# Altium PCB STM32F722-KUY.PcbDoc
Units mm, origin at the board's own origin, x right, y up, seen from the top; angles counter-clockwise.
Board outline 50.16 x 50.29 mm, 2 copper layers (Top Layer, Bottom Layer); 30 components, 61 nets, 186 pads, 23 vias.
Unrouted connection lines stored in the file: 9.
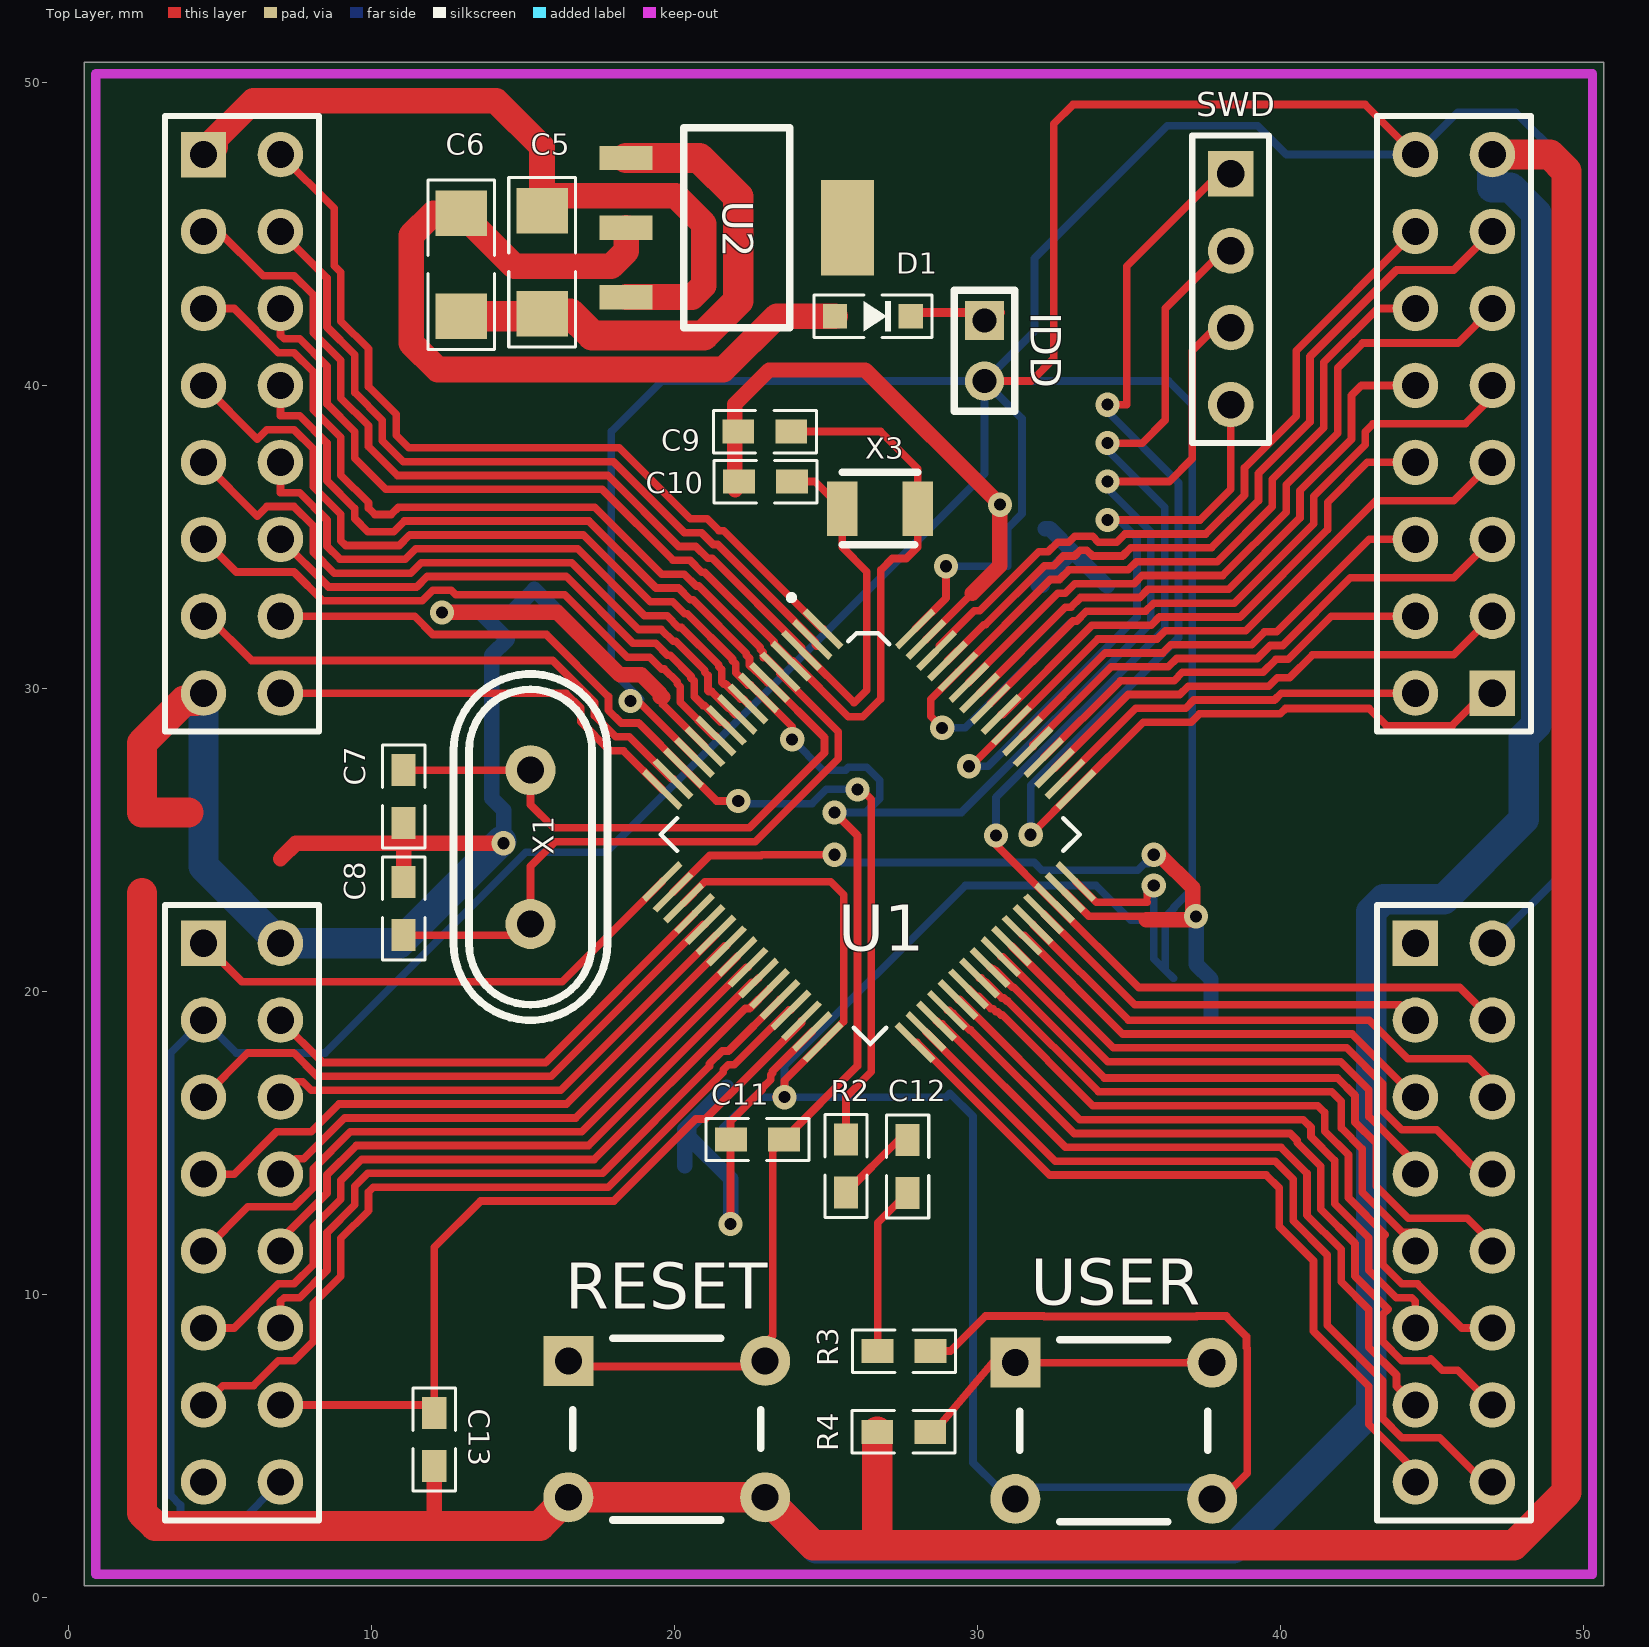
[diagram p0: Top Layer view]
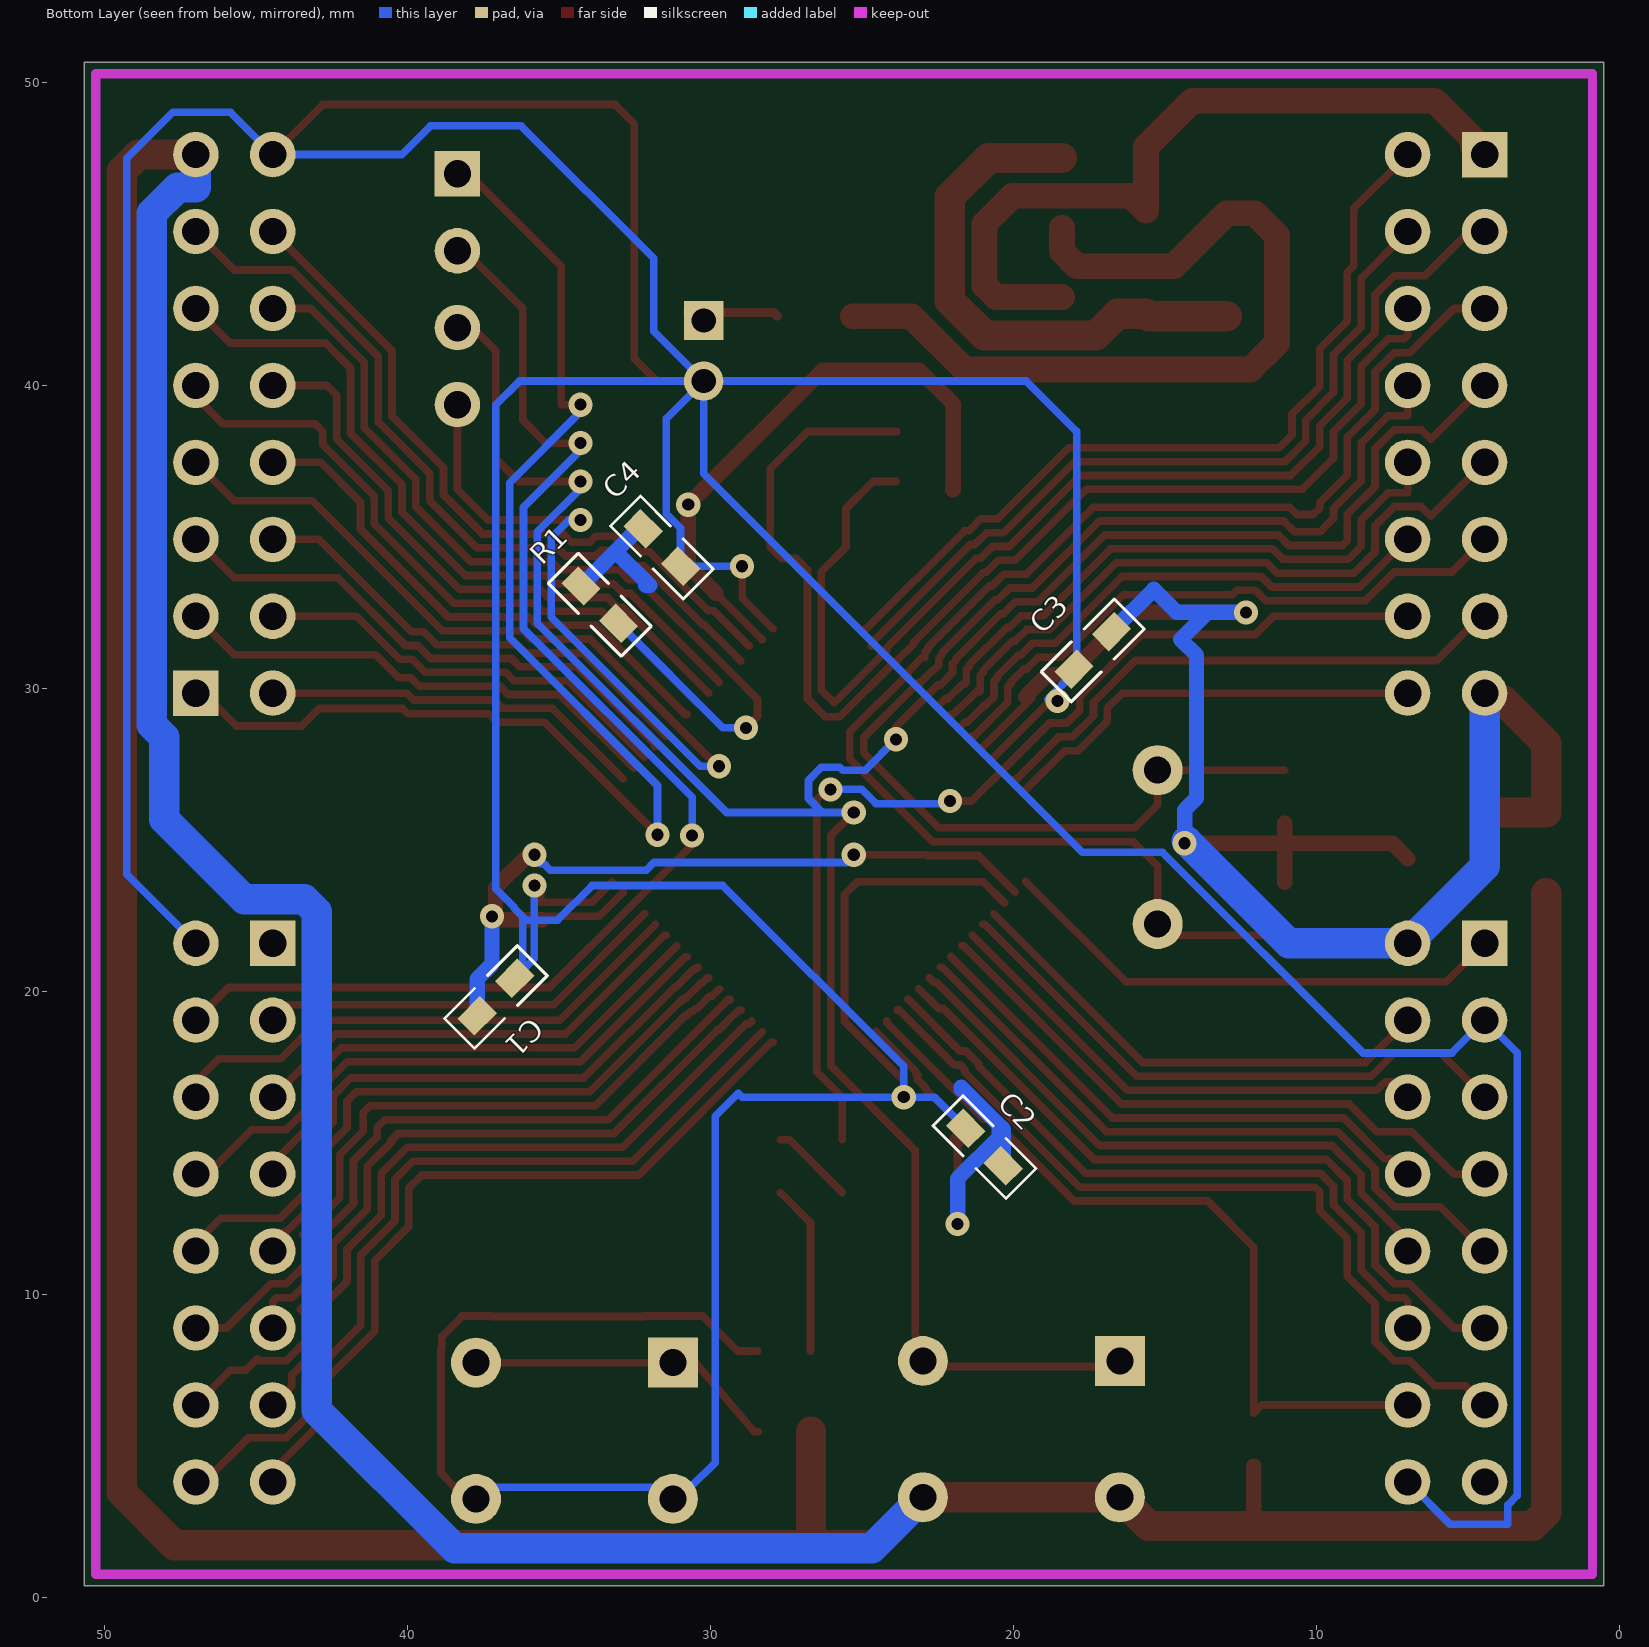
[diagram p1: Bottom Layer view, seen from below]

## Layer stack, top to bottom
Top Solder: solder mask 0.0102, Solder Resist, Dk 3.5
Top Layer: signal copper 0.0356
Dielectric 1: dielectric 0.32, FR-4, Dk 4.8
Bottom Layer: signal copper 0.0356
Bottom Solder: solder mask 0.0102, Solder Resist, Dk 3.5

## Board outline
0.508,0.381 50.673,0.381 50.673,50.673 0.508,50.673

## Design rules (kind name [scope] priority, off if disabled: settings)
Clearance [All] p1: gap=0.203
ComponentClearance [All] p1 off: gap=0.254 collisioncheckmode=3 verticalgap=0.254 showdistances=FALSE
PolygonConnect [All] p1: connectstyle=Relief reliefconductorwidth=0.254 reliefentries=4 polygonreliefangle="90 Angle" airgapwidth=0.254
RoutingVias [All] p1: holewidth=0.508 width=1.016 viastyle="Through Hole" minholewidth=0.508 minwidth=1.016 maxholewidth=0.61 maxwidth=2
SolderMaskExpansion [All] p1: expansion=0.102
Width [All] p1: maxlimit=2.54 minlimit=0.254 preferedwidth=0.4
29 further rules are at their usual default settings.

## Classes and differential pairs
component class STM32F7: C1 C2 C3 C4 C5 C6 C7 C8 C9 C10 C11 C12 C13 D1 IDD R1 R2 R3 R4 RESET SWD U1 U2 USER X1 X3 ""

## Components (designator, comment, footprint, x,y, rotation, side; value= is the part's Value field where it differs from the comment)
C1 "4.7 X5R" "Chip 0603C" 37.084,19.812 r135 bottom
C2 "100nF" "Chip 0603C" 20.955,14.859 r45 bottom
C3 "100nF" "Chip 0603C" 17.383,31.258 r315 bottom
C4 "100nF" "Chip 0603C" 31.607,34.655 r225 bottom
C5 "10uF" "Chip 1206C" 15.621,44.069 r90 top
C6 "10uF" "Chip 1206C" 12.954,43.991 r90 top
C7 "16pF HighQ" "Chip 0603C" 11.049,26.43 r90 top
C8 "C HighQ" "Chip 0603C" 11.049,22.733 r270 top
C9 "C HighQ" "Chip 0603C" 22.973,38.481 r0 top
C10 "C HighQ" "Chip 0603C" 23.001,36.83 r0 top
C11 "100nF" "Chip 0603C" 22.733,15.113 r180 top
C12 "0.1uF" "Chip 0603C" 27.686,14.224 r270 top
C13 "C" "Chip 0603C" 12.065,5.207 r90 top
D1 "BAT60JFILM" SOD323 26.543,42.291 r0 top
IDD "Jumper 2.00" "HDR-2.00 Male 1x2" 30.226,41.148 r0 top (schematic designator J1)
P2 "Header 8X2" HDR2X8 4.445,47.625 r270 top
P3 "Header 8X2" HDR2X8 4.445,21.59 r270 top
P4 "Header 8X2" HDR2X8 44.45,21.59 r270 top
P5 "Header 8X2" HDR2X8 46.99,29.845 r90 top
R1 "10k" "Chip 0603R" 33.655,32.766 r225 bottom
R2 "330" "Chip 0603R" 25.654,14.238 r90 top
R3 "100" "Chip 0603R" 27.573,8.128 r0 top
R4 "220K" "Chip 0603R" 27.559,5.461 r180 top
RESET "Tact Switches" TC-0102-Series 19.737,5.552 r0 top
SWD "Header 4" HDR1X4 38.354,46.99 r270 top (schematic designator P1)
U1 "STM32722RE" STM32F722RE-FP 26.416,25.146 r225 top locked
U2 "LD1117-5.0" SOT-223 22.098,45.212 r270 top
USER "Tact Switches" TC-0102-Series 34.492,5.497 r0 top
X1 "Crystal HC49S" HC-49S 15.24,22.225 r90 top
X3 "Crystal-32.768K" Crystal32k 25.527,35.941 r0 top

## Footprints (in the part's own frame and the unit in brackets; to place one, negate y for a bottom-side part, rotate by r counter-clockwise, add the part's x,y. Pads: shape width x height; smd on the part's side, far side on the other; paste and mask are expansions set on the pad)
"Chip 0603C" [mm]
  rect 1.05x0.8 smd: 1(-0.875,0) 2(0.875,0)
  silkscreen extent -1.7,-0.7 1.7,0.7, body extent -0.8,-0.4 0.8,0.4, height 0.9
"Chip 0603R" [mm]
  rect 1.05x0.8 smd: 1(-0.875,0) 2(0.875,0)
  silkscreen extent -1.7,-0.7 1.7,0.7, body extent -0.8,-0.4 0.8,0.4, height 0.45
"Chip 1206C" [mm]
  rect 1.5x1.7 smd: 1(-1.7,0) 2(1.7,0)
  silkscreen extent -2.8,-1.1 2.8,1.1, body extent -1.6,-0.8 1.6,0.8, height 1.5
Crystal32k [mm]
  rect 1x1.8 smd: 1(2.5,0) 2(0,0)
  silkscreen extent 0,-1.2 2.5,1.2, body extent -0.25,-0.65 2.65,0.65, height 0.8
HC-49S [mil]
  round 65 hole 35: 1(0,0) 2(200,0)
  silkscreen extent -125,-100 325,100
HDR1X4 [mm] "Connector; Header; 4 Position"
  rect 1.5x1.5 hole 0.9: 1(0,0)
  round 1.5 hole 0.9: 2(2.54,0) 3(5.08,0) 4(7.62,0)
  silkscreen extent -1.27,-1.27 8.89,1.27
HDR2X8 [mm] "Connector; Header; 8x2 Position"
  rect 1.5x1.5 hole 0.9: 1(0,0)
  round 1.5 hole 0.9: 2(0,2.54) 3(2.54,0) 4(2.54,2.54) 5(5.08,0) 6(5.08,2.54) 7(7.62,0) 8(7.62,2.54) 9(10.16,0) 10(10.16,2.54) 11(12.7,0) 12(12.7,2.54) 13(15.24,0) 14(15.24,2.54) 15(17.78,0) 16(17.78,2.54)
  silkscreen extent -1.27,-1.27 19.05,3.81
"HDR-2.00 Male 1x2" [mm]
  rect 1.3x1.3 hole 0.8: 1(0,1)
  round 1.3 hole 0.8: 2(0,-1)
  silkscreen extent -1,-2 1,2, body extent -1,-2 1,2, height 6
SOD323 [mm]
  rect 0.8x0.8 smd: 1(-1.25,0) 2(1.25,0)
  silkscreen extent -1.95,-0.7 1.95,0.7, body extent -1.35,-0.72 1.35,0.72, height 1.18
SOT-223 [mm]
  rect 0.8x1.75 smd: 1(-2.3,-3.7) 2(0,-3.7) 3(2.3,-3.7)
  rect 3.15x1.75 smd: 4(0,3.6)
  silkscreen extent -3.3,-1.8 3.3,1.7, body extent -3.25,-3.5 3.25,3.5, height 1.8
STM32F722RE-FP [mm] "LQFP64"
  rect 0.22x1.7 smd: 1(-3.747,-5.901) 2(-3.247,-5.901) 3(-2.747,-5.901) 4(-2.247,-5.901) 5(-1.747,-5.901) 6(-1.247,-5.901) 7(-0.747,-5.901) 8(-0.247,-5.901) 9(0.253,-5.901) 10(0.753,-5.901) 11(1.253,-5.901) 12(1.753,-5.901) 13(2.253,-5.901) 14(2.753,-5.901) 15(3.253,-5.901) 16(3.753,-5.901) 33(3.753,5.902) 34(3.253,5.902) 35(2.753,5.902) 36(2.253,5.902) 37(1.753,5.902) 38(1.253,5.902) 39(0.753,5.902) 40(0.253,5.902) 41(-0.247,5.902) 42(-0.747,5.902) 43(-1.247,5.902) 44(-1.747,5.902) 45(-2.247,5.902) 46(-2.747,5.902) 47(-3.247,5.902) 48(-3.746,5.901)
  rect 1.7x0.22 smd: 17(5.901,-3.753) 18(5.901,-3.253) 19(5.901,-2.753) 20(5.901,-2.253) 21(5.901,-1.753) 22(5.901,-1.253) 23(5.901,-0.753) 24(5.901,-0.253) 25(5.901,0.247) 26(5.901,0.747) 27(5.901,1.247) 28(5.901,1.747) 29(5.901,2.247) 30(5.901,2.747) 31(5.901,3.247) 32(5.901,3.747) 49(-5.902,3.753) 50(-5.902,3.253) 51(-5.902,2.753) 52(-5.902,2.253) 53(-5.902,1.753) 54(-5.902,1.253) 55(-5.902,0.753) 56(-5.902,0.253) 57(-5.902,-0.247) 58(-5.902,-0.747) 59(-5.902,-1.247) 60(-5.902,-1.747) 61(-5.902,-2.247) 62(-5.902,-2.746) 63(-5.902,-3.246) 64(-5.902,-3.746)
  silkscreen extent -4.94,-7.42 4.84,4.89
TC-0102-Series [mil]
  rect 65x65 hole 35: 1(-127.95,88.58)
  round 65 hole 35: 1(127.95,88.58) 2(-127.95,-88.58) 2(127.95,-88.58)
  silkscreen extent -122,-118 122,118

## Part data
C1 C2 C3 C4 C7 C8 C9 C10 C11 C12 C13: library part 0603-C
C5 C6: library part C1206
IDD: "Jumper 2.54mm"
P2 P3 P4 P5: "Header, 8-Pin, Dual row"
R1 R2 R3 R4: library part 0603-R
RESET USER: library part TC-0102-Series, "Tact Switches 6x6mm, Through Hole"
SWD: "Header, 4-Pin"
U1: library part STM32F722RE
U2: library part LD1117AS50TR, "Positive Fixed Voltage Regulator LDO 5.0V/1A"

## Via types
v1: diameter 0.8, hole 0.4, Top Layer to Bottom Layer, tented both sides, 23 vias

## Nets (pads, with @x,y where several pads share a name; then routed paths per layer and width w, separated by ;. In a path a pad name is that pad's centre, name@x,y a point inside that pad or via, vN(x,y) a via of type N, cw(c..) or ccw(c..) an arc to the next point about the centre after c; other vN are vias at no path point)
BOOT0: P5.12 R1.2 U1.60 | length 29.9
  Top Layer w0.254: v1(28.829,28.702) 28.448,29.083 28.448,29.648 U1.60 32.398,33.598 32.7,33.598 33.018,33.916 34.971,33.916 35.244,34.189 37.906,34.189 39.725,36.008 39.725,36.908 41.427,38.61 41.427,40.769 43.203,42.545 P5.12
  Bottom Layer w0.254: v1(28.829,28.702) 29.591,28.702 R1.2
GND: C1.1 C2.1 C3.1 C4.1 C5.1 C6.1 C7.1 C8.1 C9.1 C10.1 C11.2 C13.1 P2.15 P3.2 P5.15 R1.1 R4.2 RESET.2 U1.12 U1.18 U1.31 U1.47 U1.63 U2.1 | length 332.5
  Top Layer w0.254: 19.599,29.718 19.599,29.483 U1.12 ; U1.18 21.155,24.486 22.846,24.486 22.871,24.511 v1(25.273,24.511) ; v1(21.844,12.319) 21.844,15.099 21.844,15.716 22.892,16.764 22.892,16.812 23.165,17.085 23.165,17.243 23.228,17.306 23.228,17.367 U1.31 ; U1.63 29.826,33.147 ; U1.47 33.674,22.479 35.941,22.479
  Top Layer w0.508: 6.985,24.384 7.493,24.892 11.049,24.892 ; C8.1 11.049,24.892 ; C7.1 11.049,24.892 ; 12.065,2.357 C13.1 ; v1(12.319,32.512) 16.129,32.512 18.193,30.448 18.897,30.448 19.526,29.819 19.526,29.718 19.599,29.718 ; v1(14.351,24.892) 11.049,24.892 ; C11.2@21.844,15.099 C11.2 ; C10.1@21.999,36.576 21.999,36.562 21.985,36.576 21.985,39.384 23.114,40.513 26.289,40.513 v1(30.734,36.068) 30.734,34.055 29.826,33.147 ; 35.56,22.364 37.096,22.364 37.096,23.425 36.01,24.511 v1(35.814,24.511)
  Top Layer w1: 2.413,23.241 2.413,2.794 2.85,2.357 12.065,2.357 15.542,2.357 16.487,3.302 22.987,3.302 24.571,1.718 26.684,1.718 ; 3.937,25.908 2.413,25.908 2.413,28.194 3.81,29.591 4.191,29.591 P2.15 ; C6.1 15.543,42.291 C5.1 16.559,42.369 17.272,41.656 20.955,41.656 22.098,42.799 22.098,46.228 20.814,47.512 U2.1 ; R4.2 26.684,1.718 ; P5.15 48.895,47.625 49.439,47.081 49.439,3.465 47.692,1.718 26.684,1.718
  Bottom Layer w0.254: v1(25.273,24.511) 25.527,24.257 31.868,24.257 32.122,24.003 35.29,24.003 35.512,24.225 35.623,24.225 v1@35.814,24.416
  Bottom Layer w0.508: v1(12.319,32.512) 13.589,32.512 ; v1(14.351,24.892) 14.351,25.987 13.958,26.38 13.958,31.103 14.478,31.623 13.589,32.512 ; C3.1 15.367,33.274 14.605,32.512 13.589,32.512 ; C2.1 20.336,15.452 20.463,15.579 ; v1(21.844,12.319) 21.844,13.819 20.463,15.2 20.463,15.579 ; 32.131,33.401 32.004,33.401 33.114,34.511 33.147,34.511 ; C4.1 32.385,35.273 33.147,34.511 ; R1.1 33.147,34.511 ; v1(37.211,22.479) 37.211,20.897 37.703,20.405 C1.1 ; 20.463,15.579 21.648,16.764 ; 21.648,16.764 21.718,16.834 21.718,16.764 21.648,16.764
  Bottom Layer w1: P2.15 4.445,24.13 P3.2 10.908,21.59 v1@14.28,24.963 ; RESET.2@22.987,3.302 24.674,1.615 38.445,1.615 42.997,6.167 42.997,22.631 43.409,23.043 45.395,23.043 48.031,25.679 48.031,28.392 48.443,28.804 48.443,30.886 48.443,31.783 48.443,32.987 48.443,34.323 48.443,35.527 48.443,36.863 48.443,38.067 48.443,39.403 48.443,40.607 48.443,41.943 48.443,43.147 48.443,44.483 48.443,45.687 47.592,46.538 46.99,46.538 P5.15
NetC6_2: C6.2 D1.1 U2.2 | length 27.7
  Top Layer w0.85: U2.2 18.398,44.433 17.907,43.942 14.703,43.942 C6.2 12.036,45.691 11.303,44.958 11.303,41.402 12.177,40.528 21.605,40.528 23.368,42.291 D1.1
NetC12_1: C12.1 R2.1 R4.1 USER.1 | length 13.2
  Top Layer w0.254: R2.1 27.39,15.099 C12.1 ; R4.1 28.552,5.461 30.806,8.117 31.12,7.747 31.242,7.747 36.934,7.747 USER.1@37.315,8.128
NetC12_2: C12.2 R3.1 | length 5.6
  Top Layer w0.254: R3.1 26.698,12.361 C12.2
NetD1_2: D1.2 IDD.1 | length 3
  Top Layer w0.3: D1.2 27.92,42.418 IDD.1@30.75,42.418
NRST: C11.1 P2.7 RESET.1 SWD.3 U1.7 | length 84
  Top Layer w0.254: P2.7 6.221,38.229 6.538,38.545 7.432,38.545 8.065,37.912 8.065,36.665 8.979,35.751 8.979,34.884 9.142,34.721 10.91,34.721 11.259,35.07 16.982,35.07 19.192,32.86 19.938,32.86 20.329,32.469 20.414,32.469 21.909,30.974 21.909,30.915 22.011,30.813 22.011,30.522 22.421,30.112 22.505,30.112 U1.7 23.876,28.742 v1(23.876,28.321) ; RESET.1@16.487,7.62 22.225,7.62 23.241,8.636 23.241,14.746 C11.1 26.035,17.54 26.035,25.146 v1(25.273,25.908) ; v1(34.29,36.83) 36.322,36.83 37.084,37.592 37.084,41.148 SWD.3@38.354,42.418
  Bottom Layer w0.254: v1(23.876,28.321) 24.892,27.305 25.638,27.305 25.733,27.4 26.337,27.4 26.765,26.972 26.765,26.368 26.305,25.908 ; v1(25.273,25.908) 26.305,25.908 ; v1(34.29,36.83) 34.29,36.592 35.715,35.168 35.715,32.159 29.464,25.908 26.305,25.908
PA0: P2.14 R2.2 U1.14 | length 33.9
  Top Layer w0.254: P2.14 11.414,32.385 12.017,31.782 15.764,31.782 17.812,29.734 17.812,29.289 18.24,28.861 18.807,28.861 U1.14 21.379,26.289 v1(22.098,26.289) ; R2.2 25.654,16.513 26.492,17.351 26.492,26.34 v1@26.289,26.543
  Bottom Layer w0.254: v1(22.098,26.289) 22.193,26.194 24.543,26.194 24.543,26.21 25.003,26.67 v1(26.035,26.67)
PA1: P2.13 U1.15 | length 18
  Top Layer w0.254: P2.13 4.572,32.385 6.032,30.925 15.975,30.925 17.355,29.545 17.355,29.099 18.05,28.404 18.496,28.404 19.882,27.018 U1.15
PA2: P2.16 U1.16 | length 14.2
  Top Layer w0.254: P2.16 16.409,29.845 16.898,29.356 16.898,28.91 17.861,27.947 18.307,27.947 U1.16
PA3: P3.1 U1.17 | length 17
  Top Layer w0.254: P3.1 5.715,20.32 16.282,20.32 U1.17
PA4: P3.4 U1.20 | length 16.3
  Top Layer w0.254: P3.4 8.382,17.653 15.736,17.653 U1.20
PA5: P3.5 U1.21 | length 19.6
  Top Layer w0.254: P3.5 5.905,17.97 7.419,17.97 8.193,17.196 15.925,17.196 20.942,22.213 U1.21
PA6: P3.6 U1.22 | length 16.8
  Top Layer w0.254: P3.6 7.493,17.018 7.724,17.018 8.003,16.739 16.236,16.739 U1.22
PA7: P3.7 U1.23 | length 20.4
  Top Layer w0.254: P3.7 5.458,13.97 6.855,15.367 8.001,15.367 8.916,16.282 16.426,16.282 21.649,21.506 U1.23
PA8: P4.7 U1.41 | length 17.4
  Top Layer w0.254: U1.41 30.824,21.147 34.292,17.679 41.988,17.679 42.913,16.754 42.913,15.873 44.45,14.336 P4.7
PA9: P4.8 U1.42 | length 19.5
  Top Layer w0.254: U1.42 34.482,18.136 42.178,18.136 43.37,16.944 43.37,16.063 44.003,15.43 45.149,15.43 46.609,13.97 P4.8
PA10: P4.5 U1.43 | length 15.2
  Top Layer w0.254: U1.43 31.531,21.854 34.793,18.593 42.367,18.593 P4.5
PA11: P4.6 U1.44 | length 17.8
  Top Layer w0.254: U1.44 34.982,19.05 42.923,19.05 44.193,17.78 46.228,17.78 46.99,17.018 P4.6
PA12: P4.3 U1.45 | length 13.7
  Top Layer w0.254: U1.45 35.181,19.558 43.942,19.558 P4.3
PB0_PC5: P3.9 U1.25 | length 22.2
  Top Layer w0.254: P3.9 5.906,12.891 7.432,12.89 8.065,13.523 8.065,14.138 9.295,15.368 16.926,15.368 22.357,20.799 U1.25
PB1_PB0: P3.10 U1.26 | length 20.1
  Top Layer w0.254: P3.10 6.985,11.811 7,11.811 8.522,13.333 8.522,13.949 9.484,14.911 17.152,14.911 22.539,20.298 22.624,20.298 U1.26
PB2_PB1: P3.11 U1.27 | length 24.4
  Top Layer w0.254: P3.11 5.458,8.89 6.918,10.35 7.432,10.35 8.065,10.983 8.065,12.23 8.979,13.144 8.979,13.76 9.673,14.454 17.341,14.454 22.323,19.436 22.469,19.436 U1.27
PB5: P5.9 U1.57 | length 21.9
  Top Layer w0.254: U1.57 33.148,32.227 33.267,32.227 33.585,32.545 35.539,32.545 35.812,32.818 38.474,32.818 41.096,35.44 41.096,36.341 42.798,38.043 42.798,38.48 43.053,38.735 46.101,38.735 46.99,39.624 P5.9
PB6: P5.10 U1.58 | length 20
  Top Layer w0.254: U1.58 32.898,32.684 33.078,32.684 33.396,33.002 35.35,33.002 35.623,33.275 38.284,33.275 40.639,35.63 40.639,36.53 42.341,38.232 42.341,39.674 42.672,40.005 P5.10
PB7: P5.11 U1.59 | length 24.2
  Top Layer w0.254: U1.59 32.648,33.141 32.889,33.141 33.207,33.459 35.16,33.459 35.433,33.732 38.095,33.732 40.182,35.819 40.182,36.719 41.884,38.421 41.884,40.58 42.706,41.402 45.847,41.402 P5.11
PB8: P5.13 U1.61 | length 25.8
  Top Layer w0.254: U1.61 29.335,31.242 29.337,31.242 30.201,32.106 30.257,32.106 32.206,34.055 32.51,34.055 32.828,34.373 33.196,34.373 33.39,34.567 33.604,34.567 33.798,34.373 34.782,34.373 35.055,34.646 37.717,34.646 39.268,36.197 39.268,37.098 40.97,38.8 40.97,40.959 43.826,43.815 45.72,43.815 P5.13
PB9: P5.14 U1.62 | length 23.3
  Top Layer w0.254: U1.62@28.732,31.407 29.888,32.563 30.068,32.563 32.017,34.512 32.321,34.512 32.639,34.83 33.006,34.83 33.2,35.024 33.794,35.024 33.988,34.83 34.592,34.83 34.865,35.103 37.527,35.103 38.811,36.387 38.811,37.287 40.513,38.989 40.513,41.148 P5.14
PB10_PB2: P3.12 U1.28 | length 22.6
  Top Layer w0.254: P3.12 6.985,9.771 7.107,9.893 7.622,9.893 8.522,10.793 8.522,12.041 9.436,12.955 9.436,13.571 9.862,13.997 17.615,13.997 21.146,17.528 21.146,17.606 21.574,18.034 21.774,18.034 U1.28
PB11_PB10: P3.13 U1.29 | length 26.7
  Top Layer w0.254: P3.13 5.08,6.985 6.093,6.985 6.918,7.81 7.432,7.81 8.065,8.443 8.065,9.69 8.979,10.604 8.979,11.851 9.893,12.765 9.893,13.381 10.052,13.54 17.805,13.54 21.603,17.338 21.603,17.417 21.763,17.577 21.963,17.577 23.771,19.384 U1.29
PB12: P4.15 U1.33 | length 25.6
  Top Layer w0.254: U1.33 27.996,18.319 32.376,13.938 39.529,13.938 39.956,13.511 39.956,12.239 41.085,11.111 41.085,8.789 42.913,6.961 42.913,5.713 44.45,4.176 P4.15
PB13: P4.16 U1.34 | length 27.8
  Top Layer w0.254: U1.34 32.565,14.395 39.822,14.395 40.413,13.804 40.413,12.429 41.542,11.3 41.542,8.978 43.37,7.15 43.37,5.903 44.003,5.27 45.25,5.27 46.71,3.81 P4.16
PB14: P4.13 U1.35 | length 23.4
  Top Layer w0.254: U1.35 28.745,18.923 28.83,18.923 32.9,14.852 40.012,14.852 40.87,13.994 40.87,12.618 41.999,11.489 41.999,10.415 42.913,9.501 42.913,8.253 43.827,7.339 43.827,6.973 P4.13
PB15: P4.14 U1.36 | length 25.8
  Top Layer w0.254: U1.36 29.056,19.38 29.16,19.276 29.184,19.276 29.736,18.724 29.772,18.724 33.187,15.309 40.317,15.309 40.546,15.08 40.546,15.009 41.327,14.228 41.327,12.807 42.456,11.678 42.456,10.604 43.546,9.514 43.37,9.337 43.37,8.443 44.003,7.81 44.897,7.81 44.96,7.872 45.339,7.493 45.847,7.493 P4.14
PC0: P2.10 U1.8 | length 20.4
  Top Layer w0.254: P2.10 6.985,36.462 7.622,36.462 8.522,35.562 8.522,34.694 8.952,34.264 11.1,34.264 11.449,34.613 16.793,34.613 19.003,32.403 19.748,32.403 20.139,32.012 20.225,32.012 21.452,30.785 21.452,30.726 21.554,30.624 21.554,30.211 21.616,30.149 21.677,30.149 22.17,29.655 22.255,29.655 U1.8
PC1: P2.9 U1.9 | length 22.5
  Top Layer w0.254: P2.9 6.221,35.689 6.538,36.005 7.432,36.005 8.065,35.372 8.065,34.505 8.763,33.807 11.289,33.807 11.638,34.156 16.603,34.156 18.813,31.946 19.559,31.946 19.95,31.555 20.035,31.555 20.995,30.596 20.995,30.537 21.097,30.435 21.097,29.924 21.123,29.898 21.22,29.898 21.772,29.347 21.796,29.347 22.003,29.14 U1.9
PC2: P2.12 U1.10 | length 17.9
  Top Layer w0.254: P2.12 6.999,34.925 8.574,33.35 11.478,33.35 11.827,33.699 16.414,33.699 18.624,31.489 19.37,31.489 19.761,31.098 19.846,31.098 20.538,30.406 20.538,30.348 20.64,30.245 20.64,29.735 20.933,29.441 20.97,29.441 21.522,28.89 21.607,28.89 U1.10
PC3: P2.11 U1.11 | length 20.2
  Top Layer w0.254: P2.11 5.525,33.845 7.432,33.845 8.384,32.893 11.668,32.893 12.017,33.242 12.621,33.242 12.767,33.096 16.371,33.096 18.435,31.032 19.18,31.032 19.571,30.641 19.657,30.641 20.081,30.217 20.081,30.158 20.183,30.056 20.183,29.546 21.296,28.433 U1.11
PC4: P3.8 U1.24 | length 18.1
  Top Layer w0.254: P3.8 7.493,14.478 7.758,14.478 9.105,15.825 16.737,15.825 U1.24
PC6: P4.11 U1.37 | length 21.8
  Top Layer w0.254: U1.37 29.41,19.733 33.377,15.766 40.749,15.766 41.003,15.512 41.003,15.199 41.784,14.417 41.784,12.996 42.913,11.868 42.913,10.793 43.813,9.893 44.328,9.893 44.45,9.771 P4.11
PC7: P4.12 U1.38 | length 23.8
  Top Layer w0.254: U1.38 29.953,19.837 30.038,19.837 30.443,19.431 30.504,19.431 30.607,19.328 30.668,19.328 30.771,19.224 30.808,19.224 33.802,16.231 41.231,16.231 41.46,16.002 41.46,15.388 42.241,14.606 42.241,13.186 43.46,11.967 43.37,11.877 43.37,10.983 44.003,10.35 44.517,10.35 45.977,8.89 P4.12
PC8: P4.9 U1.39 | length 19.8
  Top Layer w0.254: U1.39 30.117,20.44 30.264,20.294 30.288,20.294 30.796,19.785 30.857,19.785 30.961,19.681 30.997,19.681 33.991,16.688 41.687,16.688 41.999,16.376 41.999,15.495 42.698,14.795 42.698,13.375 44.02,12.053 44.45,12.053 P4.9
PC9: P4.10 U1.40 | length 22
  Top Layer w0.254: U1.40 30.453,20.751 30.514,20.751 30.574,20.69 30.598,20.69 31.15,20.138 31.187,20.138 34.18,17.145 41.876,17.145 42.456,16.565 42.456,15.684 43.155,14.985 43.155,13.564 44.21,12.51 46.164,12.51 46.99,11.684 P4.10
PC10: P5.3 U1.51 | length 16.5
  Top Layer w0.254: U1.51 34.967,29.803 36.675,29.803 36.948,30.076 39.61,30.076 39.887,30.353 40.293,30.353 41.055,31.115 45.72,31.115 P5.3
PC11: P5.4 U1.52 | length 14.2
  Top Layer w0.254: U1.52 34.717,30.26 36.485,30.26 36.758,30.533 39.42,30.533 39.85,30.963 40.257,30.963 41.679,32.385 P5.4
PC12: P5.5 U1.53 | length 18
  Top Layer w0.254: U1.53 31.829,28.14 34.406,30.717 36.296,30.717 36.569,30.99 39.231,30.99 39.661,31.42 40.067,31.42 42.302,33.655 45.72,33.655 P5.5
PC13: P2.4 U1.2 | length 25.5
  Top Layer w0.254: P2.4 8.522,43.548 8.522,41.934 9.436,41.02 9.436,39.773 10.35,38.859 10.35,38.175 11.035,37.49 17.978,37.49 20.323,35.145 20.884,35.145 21.275,34.754 21.423,34.754 24.642,31.535 24.642,31.45 U1.2@24.694,31.398
PC14: C10.2 P2.3 U1.3 X3.2 | length 38.8
  Top Layer w0.254: P2.3 4.953,45.085 6.413,43.625 7.432,43.625 8.065,42.992 8.065,41.745 8.979,40.831 8.979,39.584 9.893,38.67 9.893,37.986 10.846,37.033 17.789,37.033 20.134,34.688 20.695,34.688 21.086,34.297 21.234,34.297 24.185,31.346 U1.3 25.92,29.526 26.34,29.946 26.34,33.858 25.527,34.671 X3.2 24.638,36.83 C10.2
PC15: C9.2 P2.6 U1.4 X3.1 | length 40.5
  Top Layer w0.254: P2.6 6.985,41.664 7.107,41.542 7.622,41.542 8.522,40.642 8.522,39.394 9.436,38.48 9.436,37.599 10.459,36.576 17.6,36.576 19.945,34.231 20.505,34.231 20.896,33.84 20.982,33.84 23.28,31.542 23.28,31.483 23.832,30.932 U1.4 23.892,30.908 25.731,29.069 26.211,29.069 26.797,29.655 26.797,33.909 27.178,34.29 27.646,34.29 28.027,34.671 X3.1 28.027,37.251 26.797,38.481 C9.2
PD2: P5.6 U1.54 | length 15.7
  Top Layer w0.254: U1.54 34.217,31.174 36.107,31.174 36.38,31.447 39.042,31.447 39.472,31.877 39.878,31.877 42.926,34.925 P5.6
PH0: C8.2 P2.5 U1.5 X1.1 | length 47.4
  Top Layer w0.254: P2.5 5.458,42.545 6.918,41.085 7.432,41.085 8.065,40.452 8.065,39.205 8.979,38.291 8.979,37.044 9.893,36.13 9.893,35.954 10.101,35.746 10.643,35.746 10.881,35.984 17.361,35.984 19.571,33.774 20.316,33.774 20.707,33.383 20.793,33.383 22.823,31.353 22.823,31.294 22.925,31.192 22.925,31.026 23.006,31.026 U1.5 23.478,30.493 25.4,28.571 25.4,27.686 22.657,24.943 16.053,24.943 15.24,24.13 X1.1 14.873,21.858 C8.2
PH1: C7.2 P2.8 U1.6 X1.2 | length 41.6
  Top Layer w0.254: P2.8 6.985,39.002 7.622,39.002 8.522,38.102 8.522,36.854 9.436,35.94 9.436,35.611 9.869,35.178 10.721,35.178 11.07,35.527 17.171,35.527 19.381,33.317 20.127,33.317 20.518,32.926 20.603,32.926 22.366,31.164 22.366,31.105 22.468,31.003 22.468,30.772 22.671,30.569 22.695,30.569 23.064,30.2 U1.6 24.943,28.382 24.943,27.875 22.468,25.4 16.002,25.4 15.24,26.162 X1.2 C7.2
TCK: P5.1 SWD.1 U1.49 | length 45
  Top Layer w0.254: v1(31.75,25.172) U1.49 35.467,28.889 37.053,28.889 37.326,29.162 39.988,29.162 40.163,29.337 42.926,29.337 43.498,28.765 45.656,28.765 46.482,29.591 46.736,29.591 P5.1 ; v1(34.29,39.37) 34.925,39.37 34.925,43.942 38.354,47.371 SWD.1@38.354,47.498
  Bottom Layer w0.254: v1(31.75,25.172) 31.75,26.797 36.629,31.676 36.629,36.794 34.29,39.132 v1(34.29,39.37)
TDI: P5.2 U1.50 | length 12.7
  Top Layer w0.254: U1.50 35.217,29.346 36.864,29.346 37.137,29.619 39.799,29.619 40.025,29.845 P5.2
TDO: P5.7 SWD.4 U1.55 | length 40.8
  Top Layer w0.254: v1(29.718,27.432) 29.768,27.432 U1.55 33.967,31.631 35.917,31.631 36.19,31.904 38.852,31.904 43.143,36.195 45.72,36.195 P5.7 ; v1(34.29,35.56) 37.338,35.56 38.354,36.576 SWD.4 SWD.4@38.354,39.878
  Bottom Layer w0.254: v1@29.591,27.305 v1(29.718,27.432) 30.342,27.432 35.258,32.348 35.258,34.978 34.676,35.56 v1(34.29,35.56)
TMS: P4.4 SWD.2 U1.46 | length 44.3
  Top Layer w0.254: v1(30.607,25.146) 30.607,24.839 U1.46 35.316,20.13 45.91,20.13 P4.4 ; v1(34.29,38.1) 35.433,38.1 36.195,38.862 36.195,42.545 38.354,44.704 SWD.2@38.354,44.958
  Bottom Layer w0.254: v1(30.607,25.146) 30.607,26.405 36.172,31.969 36.172,35.981 34.29,37.862 v1(34.29,38.1)
TRST: P5.8 U1.56 | length 17.7
  Top Layer w0.254: U1.56 30.827,29.14 33.775,32.088 35.728,32.088 36.001,32.361 38.663,32.361 41.553,35.251 41.553,36.151 42.867,37.465 P5.8
VCAP_1_PB11: C13.2 P3.14 U1.30 | length 25.9
  Top Layer w0.254: P3.14 11.797,6.35 C13.2 12.065,11.557 13.591,13.083 17.994,13.083 20.699,15.788 21.003,15.788 24.185,18.97 U1.30
VDD: C1.2 C2.2 C3.2 C4.2 IDD.2 P2.2 P3.3 P3.16 P4.2 P5.16 R3.2 U1.1 U1.13 U1.19 U1.32 U1.48 U1.64 USER.2 | length 307.1
  Top Layer w0.254: P2.2 8.763,45.847 8.763,43.953 8.979,43.737 8.979,42.124 9.893,41.21 9.893,39.962 10.807,39.048 10.807,38.365 11.225,37.947 18.168,37.947 20.513,35.602 21.073,35.602 21.464,35.211 21.613,35.211 24.855,31.968 U1.1 ; v1(18.542,29.591) 18.784,29.591 U1.13 ; U1.19 20.998,23.622 25.146,23.622 25.578,23.19 25.578,19.01 U1.32 23.622,17.054 23.622,16.8 23.332,16.51 v1(23.622,16.51) ; U1.64 28.956,32.984 v1(28.956,34.036) ; R3.2 29.101,8.128 30.257,9.283 32.181,9.283 32.194,9.271 37.228,9.271 37.24,9.283 38.215,9.283 38.215,9.267 38.874,8.607 38.874,8.249 38.898,8.226 38.898,4.1 38.453,3.655 USER.2@37.747,3.655 ; IDD.2 31.766,40.148 32.512,40.894 32.512,48.641 33.147,49.276 42.799,49.276 P5.16 ; U1.48 33.912,22.948 35.599,22.948 ; 35.599,23.114 35.599,23.28 v1(35.814,23.495)
  Bottom Layer w0.254: P3.16@6.858,3.81 P3.16 5.588,2.413 3.683,2.413 3.683,3.045 3.365,3.363 3.365,17.97 P3.3 5.525,17.97 8.461,17.97 15.081,24.59 17.732,24.59 30.226,37.084 IDD.2 ; C3.2@17.907,30.64 17.907,38.481 19.574,40.148 22.352,40.148 ; C3.2 18.001,30.513 18.869,29.645 18.815,29.591 v1(18.542,29.591) ; C2.2 22.606,16.51 v1(23.622,16.51) ; 22.352,40.132 22.352,40.148 ; v1(28.956,34.036) C4.2 30.988,35.29 31.464,35.766 31.464,38.91 IDD.2 ; v1(35.814,23.495) 35.814,22.352 ; C1.2 C1.2@36.195,20.701 ; USER.2@37.719,3.628 30.662,3.628 29.845,4.445 29.845,15.875 29.083,16.637 28.956,16.51 v1(23.622,16.51) ; P4.2 49.273,23.873 49.273,47.501 47.752,49.022 45.847,49.022 P5.16 40.194,47.625 39.241,48.578 36.258,48.578 31.877,44.197 31.877,41.799 IDD.2 ; 22.352,40.148 IDD.2 ; v1(23.622,16.51) 23.622,17.526 29.591,23.495 33.909,23.495 35.052,22.352 35.814,22.352 ; IDD.2 36.306,40.148 37.086,39.368 37.086,23.386 36.481,22.781 36.481,22.749 36.195,22.463 ; 35.814,22.352 36.084,22.352 36.195,22.463 ; 35.814,22.352 35.814,21.082 C1.2@36.195,20.701 ; C1.2@36.195,20.701 36.195,22.463
VIN: C5.2 P2.1 P4.1 U2.3 | length 25.4
  Top Layer w0.85: P2.1@4.826,47.879 4.572,47.879 6.096,49.403 14.097,49.403 15.621,47.879 C5.2 16.117,46.265 20.029,46.265 20.955,45.339 20.955,43.307 20.574,42.926 18.412,42.926 U2.3
VSS: P3.15
pads on no net: U2.4

## Keep-outs
Keep-Out Layer:
  lines w0.3: 0.889,0.762 50.292,0.762 50.292,50.292 0.889,50.292 0.889,0.762

## Dimensions
0.889,0.762 to 0.889,50.292 on Mechanical 1
0.889,0.762 to 50.292,0.762 on Mechanical 1